# Altium PCB PCB2.PcbDoc (part 3 of 4)
Units mm, origin at the board's own origin, x right, y up, seen from the top; angles counter-clockwise.
Board outline 100 x 100 mm, 4 copper layers (TOP-SIG, GND1, GND2, BOT-SIG), stack 1.586 mm thick; 331 components, 152 nets, 869 pads, 934 vias.
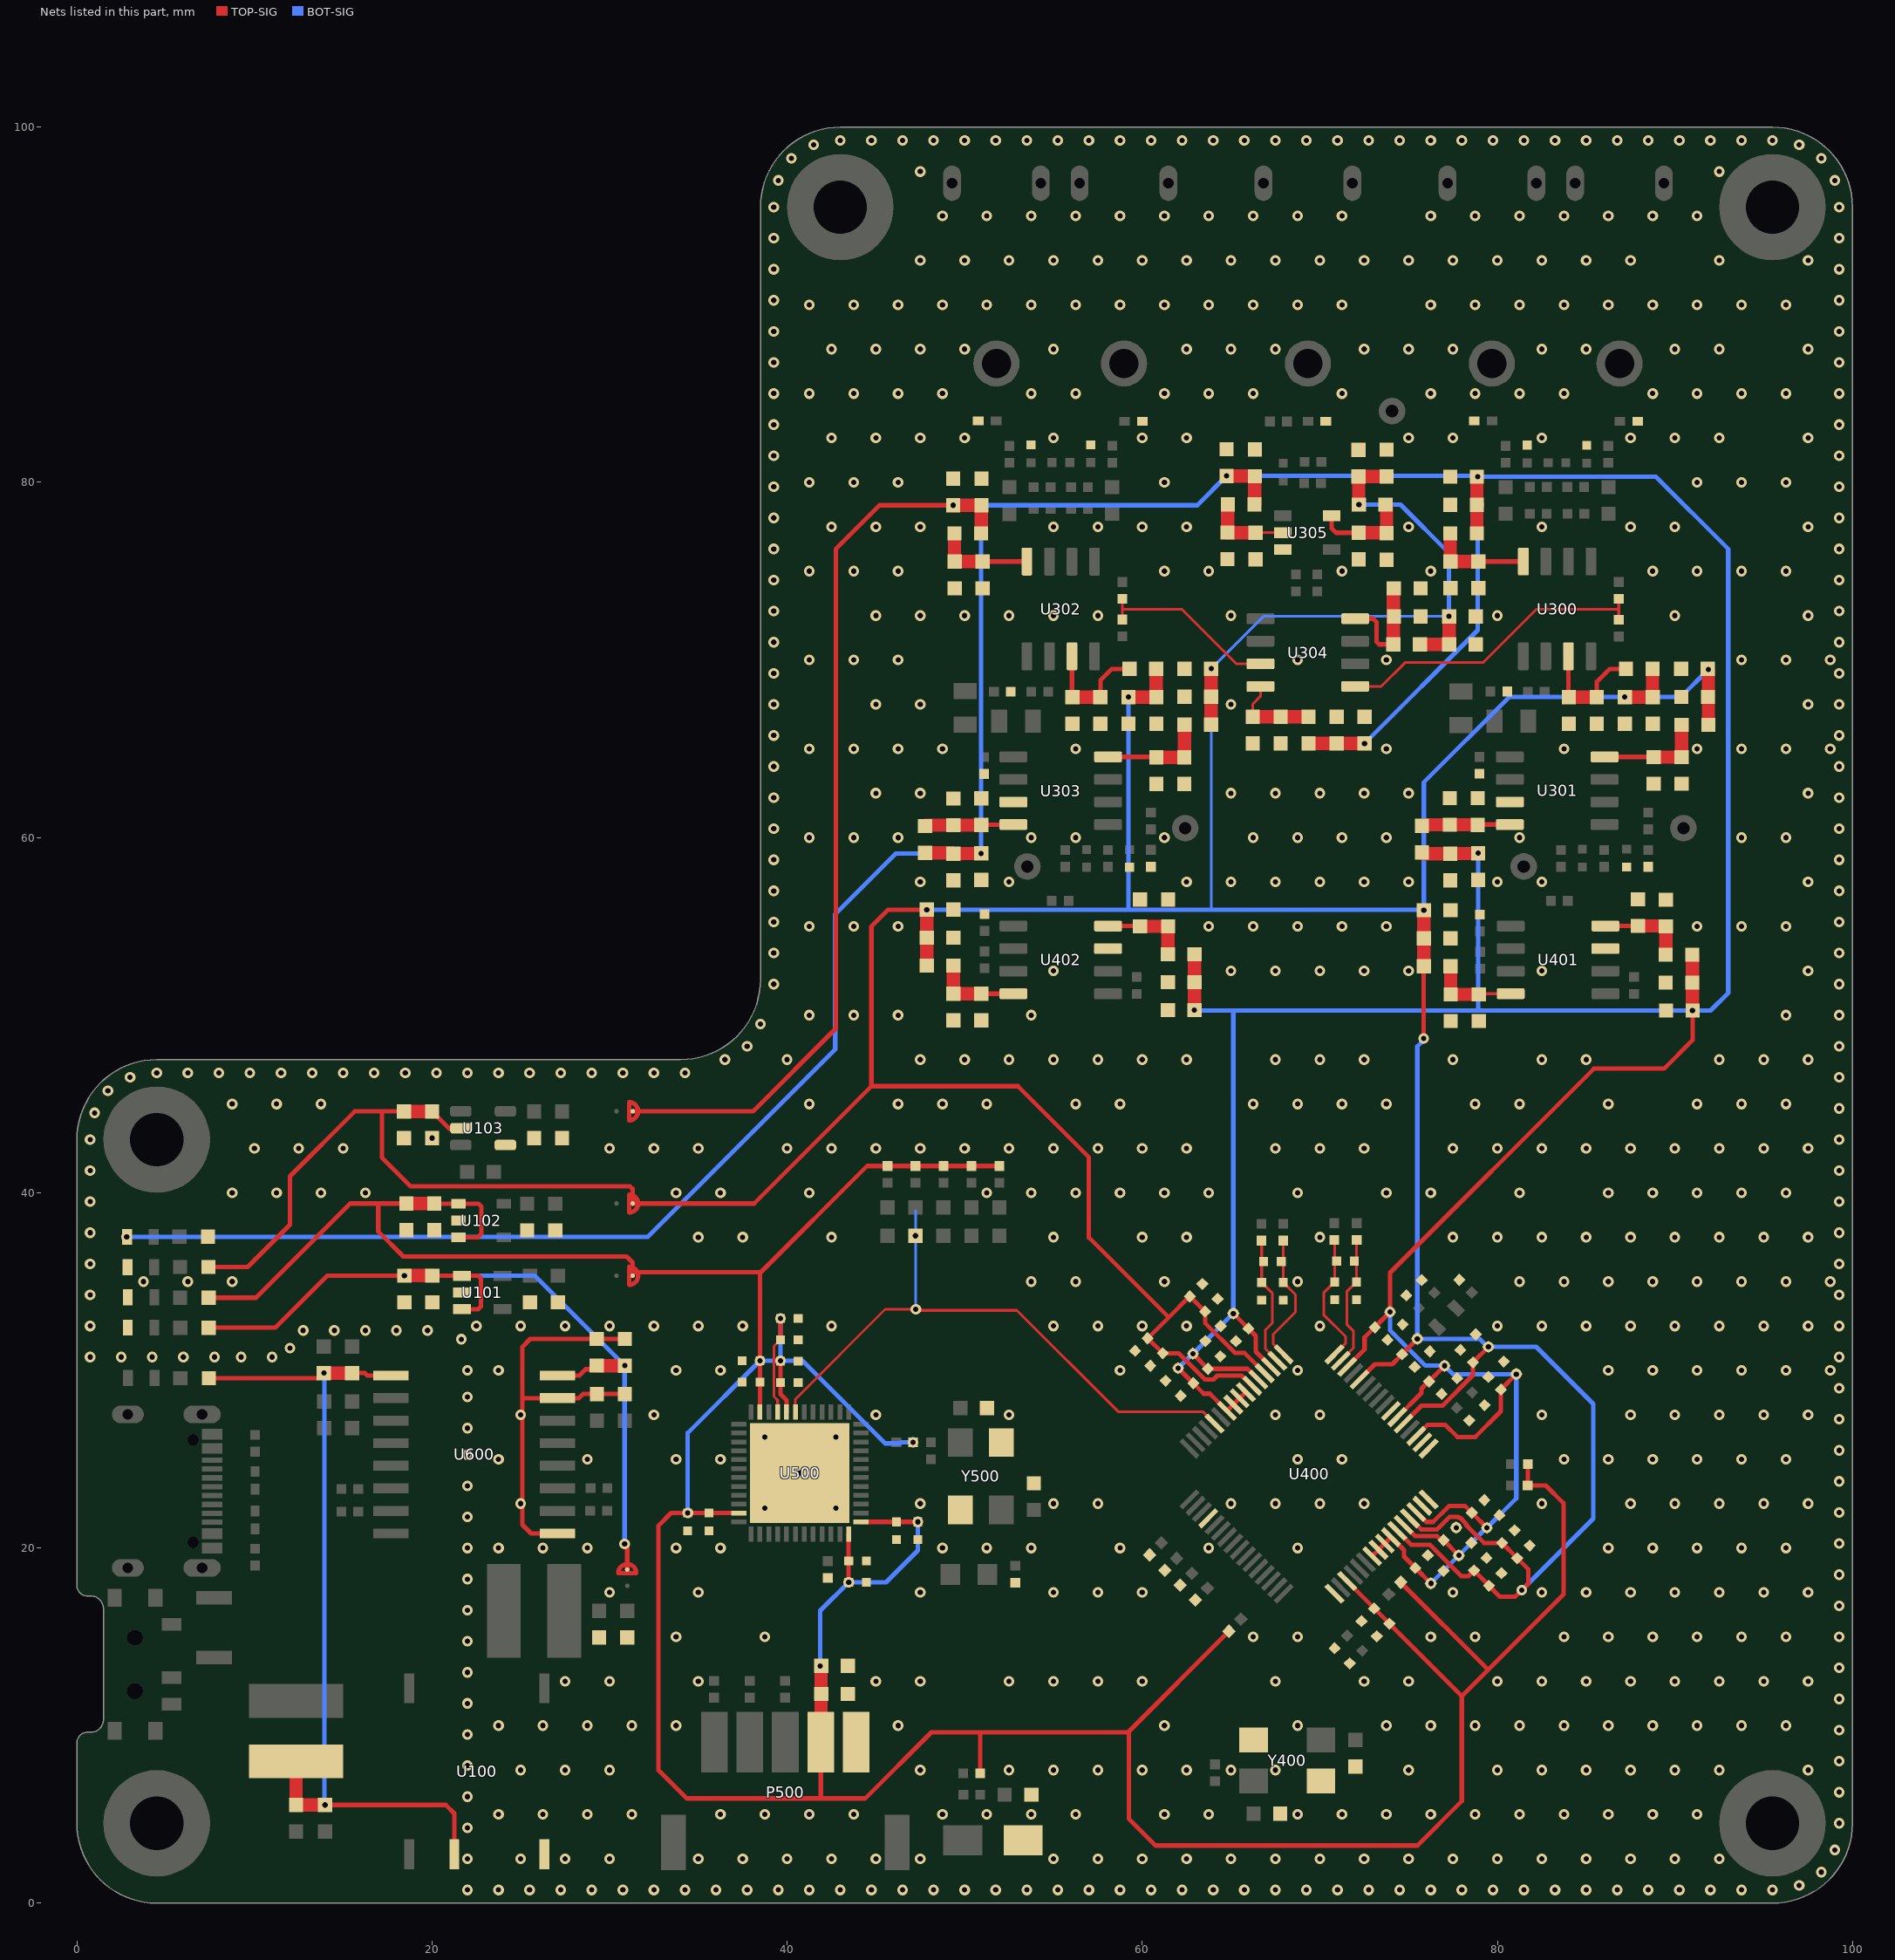
[diagram p4: the nets of this part, all layers, seen from the top]

## Via types
v1: diameter 0.6, hole 0.3, TOP-SIG to BOT-SIG, tented both sides, 598 vias
v2: diameter 0.6, hole 0.3, TOP-SIG to BOT-SIG, 296 vias
v3: diameter 0.6, hole 0.6, TOP-SIG to BOT-SIG, 40 vias

## Nets (pads, with @x,y where several pads share a name; then routed paths per layer and width w, separated by ;. In a path a pad name is that pad's centre, name@x,y a point inside that pad or via, vN(x,y) a via of type N, cw(c..) or ccw(c..) an arc to the next point about the centre after c; other vN are vias at no path point) (continued)
-2.5: (continued)
  TOP-SIG w0.75: FB311.2@47.765,59.145 49.318,59.145 C365.1@49.366,59.097 49.373,59.104 v2(50.933,59.104) ; v2(49.35,78.709) 50.923,78.709 50.936,78.696 50.936,77.135 FB310.2@50.924,77.123 ; v2(62.94,50.285) 62.944,50.288 62.944,53.431 FB404.2@62.947,53.434 ; v2(64.753,80.362) 64.761,80.354 66.336,80.354 C333.1@66.344,80.347 66.332,80.335 66.332,78.774 FB303.2@66.32,78.762 ; FB302.2@69.371,65.3 v2(72.52,65.3) ; FB309.2@75.748,59.158 75.81,59.096 C357.1@77.348,59.096 77.36,59.108 78.912,59.108 v2(78.924,59.12) ; FB308.2@78.842,77.131 FB308.2@78.846,77.127 C354.2@78.846,80.319 ; C353.1@78.876,78.729 C353.1@78.88,78.734 ; FB403.2@90.98,53.41 90.991,53.399 v2(90.991,50.271)
  BOT-SIG w0.25: v2(2.807,37.521) 32.151,37.521 42.71,48.08 42.71,55.69 46.124,59.104 v2(50.933,59.104) 50.933,78.642 51,78.709 ; v2(49.35,78.709) 51,78.709 ; v2(62.024,30.127) 62.837,30.939 v2(62.854,30.939) 65.12,33.205 v2(65.13,33.205) 65.13,50.271 ; v2@62.954,50.271 65.13,50.271 ; v2(72.52,65.3) 78.896,71.675 v2(78.896,80.319) ; v2(73.956,33.294) 73.956,32.256 75.949,30.264 v2(77.026,30.264) 77.499,29.791 v2(81.069,29.791) 81.069,22.794 v2(79.411,21.137) 79.384,21.137 v2(77.83,19.583) 77.83,19.578 v2(76.257,18.006) ; v2(78.924,59.12) 78.924,50.368 79.021,50.271 ; 51,78.709 63.1,78.709 v2(64.753,80.362) 78.853,80.362 v2(78.896,80.319) ; 65.13,50.271 79.021,50.271 ; v2(78.896,80.319) 88.931,80.319 93,76.25 93,51.25 92.01,50.26 91.001,50.26 v2(90.991,50.271) 79.021,50.271
-2.5_U300: C351.1 C352.2 FB308.1 U300.4 | length 5.7
  TOP-SIG w0.25: C351.1@78.934,75.54 78.935,75.542 U300.4@81.463,75.542
  TOP-SIG w0.75: FB308.1@77.346,77.127 77.352,77.121 77.352,75.547 C352.2@77.359,75.541 C351.1@78.934,75.54
-2.5_U301: C355.1 C356.2 FB309.1 U301.4 | length 5
  TOP-SIG w0.25: C355.1@78.897,60.717 78.914,60.734 U301.4@80.701,60.734
  TOP-SIG w0.75: FB309.1@75.748,60.658 75.81,60.72 C356.2@77.323,60.72 77.324,60.719 78.895,60.719 C355.1@78.897,60.717
-2.5_U302: C359.1 C360.2 FB310.1 U302.4 | length 5.7
  TOP-SIG w0.15: C359.1@51.013,75.536 C359.1@51.018,75.541
  TOP-SIG w0.25: C359.1@51.018,75.541 U302.4@53.506,75.541
  TOP-SIG w0.75: FB310.1@49.424,77.123 49.431,77.116 49.431,75.543 C360.2@49.438,75.536 C359.1@51.013,75.536
-2.5_U303: C363.1 C364.2 FB311.1 U303.4 | length 5
  TOP-SIG w0.25: C363.1@50.935,60.709 50.96,60.733 U303.4@52.744,60.733
  TOP-SIG w0.75: FB311.1@47.765,60.645 47.814,60.694 C364.2@49.36,60.694 49.368,60.701 50.928,60.701 C363.1@50.935,60.709
-2.5_U304: C327.1 C328.2 FB302.1 U304.4 | length 5
  TOP-SIG w0.15: C327.1@66.221,66.8 66.221,67.511 66.659,67.949 U304.4@66.659,68.514
  TOP-SIG w0.75: C327.1@66.221,66.8 66.222,66.799 C328.2@67.795,66.799 ; FB302.1@69.371,66.8 FB302.1@69.371,66.8 67.797,66.799 C328.2@67.796,66.798 ; C328.2@67.795,66.799 C328.2@67.796,66.798
-2.5_U305: C331.1 C332.2 FB303.1 U305.2 | length 4.7
  TOP-SIG w0.15: C331.1@66.38,77.163 66.384,77.167 U305.2@67.921,77.167
  TOP-SIG w0.75: FB303.1@64.82,78.762 64.812,78.754 64.812,77.183 C332.2@64.804,77.175 64.81,77.169 66.374,77.169 C331.1@66.38,77.163
-2.5_U401: C461.1 C462.2 FB403.1 U401.4 | length 5
  TOP-SIG w0.25: U401.4@86.086,55.019 87.91,55.019 C461.1@87.914,55.023
  TOP-SIG w0.75: C461.1@87.914,55.023 89.463,55.023 C462.2@89.489,54.997 89.485,54.992 89.485,53.415 FB403.1@89.48,53.41
-2.5_U402: C465.1 C466.2 FB404.1 U402.4 | length 5
  TOP-SIG w0.25: U402.4@58.078,55.018 59.868,55.018 C465.1@59.881,55.005
  TOP-SIG w0.75: FB404.1@61.447,53.434 61.451,53.439 61.451,55.002 C466.2@61.456,55.007 C466.2@61.456,55.007 C465.1@59.882,55.006 ; C465.1@59.881,55.005 C465.1@59.882,55.006
AIN0+_5: C401.1 C402.1 R403.2 U400.64 | length 7.5
  TOP-SIG w0.15: R403.2@70.815,37.338 70.84,37.314 C402.1@70.84,34.98 ; U400.64@70.834,30.907 71.46,31.533 71.46,31.893 70.22,33.133 70.22,34.363 70.662,34.805 70.665,34.805 70.837,34.977 C402.1@70.837,34.98
AIN0-_5: C400.2 C401.2 R401.2 U400.63 | length 7.5
  TOP-SIG w0.15: U400.63@71.184,30.55 71.89,31.256 71.89,32.22 71.52,32.59 71.52,34.436 C400.2@72.065,34.98 72.065,37.318 R401.2@72.085,37.338
AIN1+_5: C404.1 C407.1 R409.2 U400.2 | length 7.4
  TOP-SIG w0.15: R409.2@66.714,37.308 66.726,37.296 C407.1@66.726,34.95 67.32,34.356 67.32,32.66 66.94,32.28 66.94,31.219 U400.2@67.609,30.55
AIN1-_5: C403.2 C404.2 R407.2 U400.1 | length 7.4
  TOP-SIG w0.15: R407.2@67.942,37.308 67.95,37.3 C403.2@67.95,34.95 68.62,34.28 68.62,33.27 67.38,32.03 67.38,31.486 U400.1@67.962,30.904
EEG_CH1_VCM_4: R308.1 R310.1 U304.5 | length 17.8
  TOP-SIG w0.15: U304.5@71.993,68.514 73.464,68.514 74.8,69.85 79.19,69.85 82.193,72.853 86.837,72.853 ; R308.1@86.837,72.27 86.837,72.853 ; R310.1@86.837,73.437 86.837,72.853
EEG_CH2_VCM_4: R321.1 R323.1 U304.3 | length 10.2
  TOP-SIG w0.15: R321.1@58.88,72.281 58.88,72.859 ; R323.1@58.88,73.436 58.88,72.859 ; U304.3@66.659,69.784 65.296,69.784 62.221,72.859 58.88,72.859
GND: C102.1 C103.1 C104.1 C105.1 C106.1 C107.1 C108.1 C109.1 C110.1 C111.1 C113.1 C114.1 C115.1 C116.1 C302.1 C304.2 C305.1 C311.1 C313.2 C314.1 C319.2 C320.1 C321.2 C322.1 C323.2 C324.1 C325.2 C326.1 C327.2 C328.1 C329.2 C330.1 C331.2 C332.1 C333.2 C334.1 C335.2 C336.1 C337.2 C338.1 C339.2 C340.1 C341.2 C342.1 C343.2 C344.1 C345.2 C346.1 C347.2 C348.1 C349.2 C350.1 C351.2 C352.1 C353.2 C354.1 C355.2 C356.1 C357.2 C358.1 C359.2 C360.1 C361.2 C362.1 C363.2 C364.1 C365.2 C366.1 C400.1 C402.2 C403.1 C405.1 C406.2 C407.2 C408.1 C409.2 C410.1 C411.2 C412.1 C413.1 C414.1 C415.2 C416.1 C417.2 C418.1 C419.2 C420.1 C421.2 C422.1 C423.2 C424.1 C427.2 C428.1 C431.2 C432.1 C433.2 C434.1 C441.2 C442.1 C443.2 C444.1 C447.2 C448.1 C449.2 C450.1 C451.2 C452.1 C453.2 C454.1 C455.2 C456.1 C457.2 C458.1 C459.2 C460.1 C461.2 C462.1 C463.2 C464.1 C465.2 C466.1 C467.2 C468.1 C469.2 C470.1 C471.2 C472.1 C473.2 C474.1 C500.1 C501.1 C502.2 C503.1 C504.1 C505.1 C506.1 C507.1 C508.1 C509.1 C510.1 C511.2 C512.1 C513.2 C514.1 C515.1 C516.2 C603.1 C604.2 C607.1 C608.2 D104.2 D200.2 D201.2 D202.2 D203.2 D204.2 P500.5 R100.2 R104.2 R105.2 R307.1 R309.1 R312.1 R320.1 R322.1 R325.1 R404.1 R410.1 R415.1 R416.1 R418.1 R419.1 R500.2 R504.2 SW500.2 U100.7 U101.2 U102.2 U103.4 U301.3 U303.3 U305.3 U400.20 U400.33 U400.47 U400.48 U400.49 U400.50 U400.55 U401.3 U402.3 U500.49 U600.9 U600.15 Y400.2 Y400.4 Y500.2 Y500.4 | length 23.9
  TOP-SIG w0.25: 25.09,28.33 25.09,21.31 25.58,20.82 U600.9@27.062,20.82 ; C604.2@30.86,31.767 25.537,31.767 25.09,31.32 25.09,28.44 28.29,28.44 28.522,28.672 C607.1@30.864,28.672 ; U500.49@40.72,24.22 40.73,24.22 v2(40.74,24.23)
  other v1: 25,2.5 27.5,2.5 30,2.5 35,2.5 37.5,2.5 40,2.5 42.5,2.5 45,2.5 47.5,2.5 55,2.5 57.5,2.5 60,2.5 62.5,2.5 65,2.5 67.5,2.5 70,2.5 72.5,2.5 75,2.5 77.5,2.5 80,2.5 82.5,2.5 85,2.5 87.5,2.5 90,2.5 92.5,2.5 23.75,5 26.25,5 28.75,5 31.25,5 36.25,5 38.75,5 41.25,5 43.75,5 48.75,5 51.25,5 53.75,5 56.25,5 61.25,5 63.75,5 68.75,5 71.25,5 73.75,5 76.25,5 78.75,5 81.25,5 83.75,5 86.25,5 88.75,5 91.25,5 25,7.5 27.5,7.5 30,7.5 47.5,7.5 52.5,7.5 55,7.5 57.5,7.5 60,7.5 62.5,7.5 65,7.5 67.5,7.5 75,7.5 80,7.5 82.5,7.5 85,7.5 87.5,7.5 90,7.5 92.5,7.5 97.5,7.5 23.75,10 26.25,10 28.75,10 31.25,10 33.75,10 46.25,10 61.25,10 68.75,10 73.75,10 76.25,10 78.75,10 81.25,10 83.75,10 86.25,10 88.75,10 91.25,10 93.75,10 96.25,10 27.5,12.5 30,12.5 35,12.5 45,12.5 47.5,12.5 52.5,12.5 55,12.5 57.5,12.5 60,12.5 67.5,12.5 72.5,12.5 75,12.5 80,12.5 82.5,12.5 85,12.5 87.5,12.5 90,12.5 92.5,12.5 95,12.5 97.5,12.5 33.75,15 38.75,15 66.25,15 68.75,15 76.25,15 78.75,15 83.75,15 86.25,15 88.75,15 91.25,15 93.75,15 96.25,15 30,17.5 35,17.5 47.5,17.5 55,17.5 57.5,17.5 60,17.5 77.5,17.5 82.5,17.5 85,17.5 87.5,17.5 90,17.5 92.5,17.5 95,17.5 97.5,17.5 23.75,20 26.25,20 28.75,20 33.75,20 36.25,20 48.75,20 51.25,20 53.75,20 58.75,20 63.75,20 68.75,20 86.25,20 88.75,20 91.25,20 93.75,20 96.25,20 25,22.5 47.5,22.5 55,22.5 57.5,22.5 65,22.5 67.5,22.5 70,22.5 72.5,22.5 82.5,22.5 87.5,22.5 90,22.5 92.5,22.5 95,22.5 97.5,22.5 23.75,25 28.75,25 33.75,25 36.25,25 68.75,25 71.25,25 83.75,25 86.25,25 88.75,25 91.25,25 93.75,25 96.25,25 25,27.5 32.5,27.5 45,27.5 52.5,27.5 67.5,27.5 70,27.5 82.5,27.5 87.5,27.5 90,27.5 92.5,27.5 95,27.5 97.5,27.5 23.75,30 33.75,30 36.25,30 58.75,30 68.75,30 86.25,30 88.75,30 91.25,30 93.75,30 96.25,30 98.75,30 22.5,32.5 25,32.5 27.5,32.5 30,32.5 32.5,32.5 35,32.5 37.5,32.5 42.5,32.5 55,32.5 57.5,32.5 60,32.5 62.5,32.5 70,32.5 80,32.5 82.5,32.5 85,32.5 87.5,32.5 90,32.5 92.5,32.5 95,32.5 97.5,32.5 3.75,35 6.25,35 8.75,35 53.75,35 56.25,35 61.25,35 68.75,35 81.25,35 83.75,35 86.25,35 88.75,35 91.25,35 93.75,35 96.25,35 98.75,35 35,37.5 37.5,37.5 42.5,37.5 55,37.5 60,37.5 62.5,37.5 70,37.5 77.5,37.5 80,37.5 82.5,37.5 85,37.5 87.5,37.5 90,37.5 92.5,37.5 95,37.5 97.5,37.5 8.75,40 11.25,40 13.75,40 16.25,40 33.75,40 36.25,40 41.25,40 51.25,40 53.75,40 56.25,40 58.75,40 61.25,40 63.75,40 68.75,40 73.75,40 76.25,40 81.25,40 86.25,40 88.75,40 91.25,40 93.75,40 96.25,40 10,42.5 12.5,42.5 15,42.5 30,42.5 32.5,42.5 35,42.5 40,42.5 42.5,42.5 45,42.5 47.5,42.5 50,42.5 52.5,42.5 55,42.5 57.5,42.5 60,42.5 62.5,42.5 67.5,42.5 70,42.5 72.5,42.5 77.5,42.5 80,42.5 82.5,42.5 85,42.5 87.5,42.5 90,42.5 92.5,42.5 95,42.5 97.5,42.5 8.75,45 11.25,45 13.75,45 41.25,45 46.25,45 48.75,45 51.25,45 56.25,45 58.75,45 66.25,45 68.75,45 71.25,45 73.75,45 78.75,45 81.25,45 86.25,45 91.25,45 93.75,45 96.25,45 40,47.5 47.5,47.5 50,47.5 52.5,47.5 55,47.5 57.5,47.5 60,47.5 62.5,47.5 67.5,47.5 70,47.5 72.5,47.5 77.5,47.5 82.5,47.5 85,47.5 92.5,47.5 95,47.5 97.5,47.5 41.25,50 43.75,50 46.25,50 53.75,50 96.25,50 55,52.5 65,52.5 67.5,52.5 70,52.5 72.5,52.5 75,52.5 82.5,52.5 97.5,52.5 41.25,55 43.75,55 46.25,55 63.75,55 66.25,55 68.75,55 71.25,55 73.75,55 91.25,55 93.75,55 96.25,55 47.5,57.5 52.5,57.5 62.5,57.5 65,57.5 67.5,57.5 70,57.5 72.5,57.5 75,57.5 80,57.5 82.5,57.5 97.5,57.5 41.25,60 43.75,60 46.25,60 53.75,60 56.25,60 61.25,60 66.25,60 68.75,60 71.25,60 73.75,60 81.25,60 93.75,60 96.25,60 45,62.5 47.5,62.5 65,62.5 67.5,62.5 70,62.5 72.5,62.5 75,62.5 97.5,62.5 41.25,65 43.75,65 46.25,65 48.75,65 56.25,65 73.75,65 83.75,65 91.25,65 93.75,65 96.25,65 98.75,65 45,67.5 47.5,67.5 65,67.5 97.5,67.5 41.25,70 43.75,70 46.25,70 68.75,70 73.75,70 93.75,70 96.25,70 98.75,70 45,72.5 47.5,72.5 50,72.5 52.5,72.5 55,72.5 57.5,72.5 65,72.5 80,72.5 90,72.5 97.5,72.5 41.25,75 43.75,75 46.25,75 61.25,75 63.75,75 71.25,75 76.25,75 88.75,75 91.25,75 93.75,75 96.25,75 42.5,77.5 45,77.5 47.5,77.5 55,77.5 57.5,77.5 60,77.5 62.5,77.5 75,77.5 82.5,77.5 87.5,77.5 90,77.5 97.5,77.5 41.25,80 43.75,80 46.25,80 61.25,80 91.25,80 93.75,80 96.25,80 42.5,82.5 45,82.5 47.5,82.5 50,82.5 55,82.5 60,82.5 62.5,82.5 75,82.5 77.5,82.5 82.5,82.5 87.5,82.5 90,82.5 92.5,82.5 97.5,82.5 41.25,85 43.75,85 46.25,85 48.75,85 53.75,85 56.25,85 61.25,85 63.75,85 66.25,85 71.25,85 76.25,85 78.75,85 81.25,85 83.75,85 88.75,85 91.25,85 93.75,85 96.25,85 42.5,87.5 45,87.5 47.5,87.5 50,87.5 55,87.5 62.5,87.5 65,87.5 67.5,87.5 72.5,87.5 75,87.5 77.5,87.5 82.5,87.5 85,87.5 90,87.5 92.5,87.5 97.5,87.5 41.25,90 43.75,90 46.25,90 48.75,90 51.25,90 53.75,90 56.25,90 58.75,90 61.25,90 63.75,90 66.25,90 68.75,90 71.25,90 76.25,90 78.75,90 81.25,90 83.75,90 86.25,90 88.75,90 91.25,90 93.75,90 96.25,90 47.5,92.5 50,92.5 52.5,92.5 55,92.5 57.5,92.5 60,92.5 62.5,92.5 65,92.5 67.5,92.5 70,92.5 72.5,92.5 75,92.5 77.5,92.5 80,92.5 82.5,92.5 85,92.5 87.5,92.5 92.5,92.5 97.5,92.5 48.75,95 51.25,95 53.75,95 56.25,95 58.75,95 61.25,95 63.75,95 66.25,95 68.75,95 71.25,95 76.25,95 78.75,95 81.25,95 83.75,95 86.25,95 88.75,95 91.25,95 47.5,97.5 92.5,97.5
  other v2: 22,0.75 23.75,0.75 25.5,0.75 27.25,0.75 29,0.75 30.75,0.75 32.5,0.75 34.25,0.75 36,0.75 37.75,0.75 39.5,0.75 41.25,0.75 43,0.75 44.75,0.75 46.5,0.75 48.25,0.75 50,0.75 51.75,0.75 53.5,0.75 55.25,0.75 57,0.75 58.75,0.75 60.5,0.75 62.25,0.75 64,0.75 65.75,0.75 67.5,0.75 69.25,0.75 71,0.75 72.75,0.75 74.5,0.75 76.25,0.75 78,0.75 79.75,0.75 81.5,0.75 83.25,0.75 85,0.75 86.75,0.75 88.5,0.75 90.25,0.75 92,0.75 93.75,0.75 95.5,0.75 97,1 98.25,1.75 22,2.5 99,3 22,4.25 99.25,4.5 22,6 99.25,6.25 22,7.75 99.25,8 22,9.5 99.25,9.75 22,11.25 99.25,11.5 22,13 99.25,13.25 22,14.75 99.25,15 22,16.5 99.25,16.75 22,18.25 99.25,18.5 22,20 99.25,20.25 77.683,21.147 22,21.75 99.25,22 38.75,22.25 42.75,22.25 22,23.5 99.25,23.75 22,25.25 99.25,25.5 38.75,26.25 42.75,26.25 22,26.75 99.25,27.25 22,28.5 99.25,29 22,30 0.75,30.75 2.5,30.75 4.25,30.75 6,30.75 7.75,30.75 9.25,30.75 11,30.75 99.25,30.75 12,31.25 21.655,31.755 12.75,32.25 14.5,32.25 16.25,32.25 18,32.25 19.75,32.25 0.75,32.5 99.25,32.5 0.75,34.25 99.25,34.25 0.75,36 99.25,36 0.75,37.75 99.25,37.75 0.75,39.5 99.25,39.5 0.75,41.25 99.25,41.25 0.75,43 99.25,43 20.004,43.08 1,44.5 99.25,44.75 1.75,45.75 3,46.5 99.25,46.5 4.5,46.75 6.25,46.75 8,46.75 9.75,46.75 11.5,46.75 13.25,46.75 15,46.75 16.75,46.75 18.5,46.75 20.25,46.75 22,46.75 23.75,46.75 25.5,46.75 27.25,46.75 29,46.75 30.75,46.75 32.5,46.75 34.25,46.75 36.5,47.5 37.75,48.25 99.25,48.25 38.5,49.5 99.25,50 39.25,51.75 99.25,51.75 39.25,53.5 99.25,53.5 39.25,55.25 99.25,55.25 39.25,57 99.25,57 39.25,58.75 99.25,58.75 39.25,60.5 99.25,60.5 39.25,62.25 99.25,62.25 39.25,64 99.25,64 39.25,65.75 99.25,65.75 39.25,67.5 99.25,67.5 39.25,69.25 99.25,69.25 39.25,71 99.25,71 39.25,72.75 99.25,72.75 39.25,74.5 99.25,74.5 39.25,76.25 99.25,76.25 39.25,78 99.25,78 39.25,79.75 99.25,79.75 39.25,81.5 99.25,81.5 39.25,83.25 99.25,83.25 39.25,85 99.25,85 39.25,86.75 99.25,86.75 39.25,88.5 99.25,88.5 39.25,90.25 99.25,90.25 39.25,92 99.25,92 39.25,93.75 99.25,93.75 39.25,95.5 99.25,95.5 39.5,97 99,97 40.25,98.25 98.25,98.25 41.5,99 97,99 43,99.25 44.75,99.25 46.5,99.25 48.25,99.25 50,99.25 51.75,99.25 53.5,99.25 55.25,99.25 57,99.25 58.75,99.25 60.5,99.25 62.25,99.25 64,99.25 65.75,99.25 67.5,99.25 69.25,99.25 71,99.25 72.75,99.25 74.5,99.25 76.25,99.25 78,99.25 79.75,99.25 81.5,99.25 83.25,99.25 85,99.25 86.75,99.25 88.5,99.25 90.25,99.25 92,99.25 93.75,99.25 95.5,99.25
GPIO0_MODE0: D400.1 U400.12 U500.19 | length 34.7
  TOP-SIG w0.15: U500.19@40.47,27.655 40.47,28.383 45.527,33.44 v2(47.25,33.44) 47.31,33.38 52.94,33.38 58.641,27.679 63.409,27.679 U400.12@64.073,27.015
  BOT-SIG w0.15: v2(47.23,37.58) v2@47.24,37.57 ; 47.24,39 47.24,33.45 v2(47.25,33.44)